# EAGLE board Teensy3_2_4IN:4OUTmcp4628 PANEL (EAGLE 9.5.1)
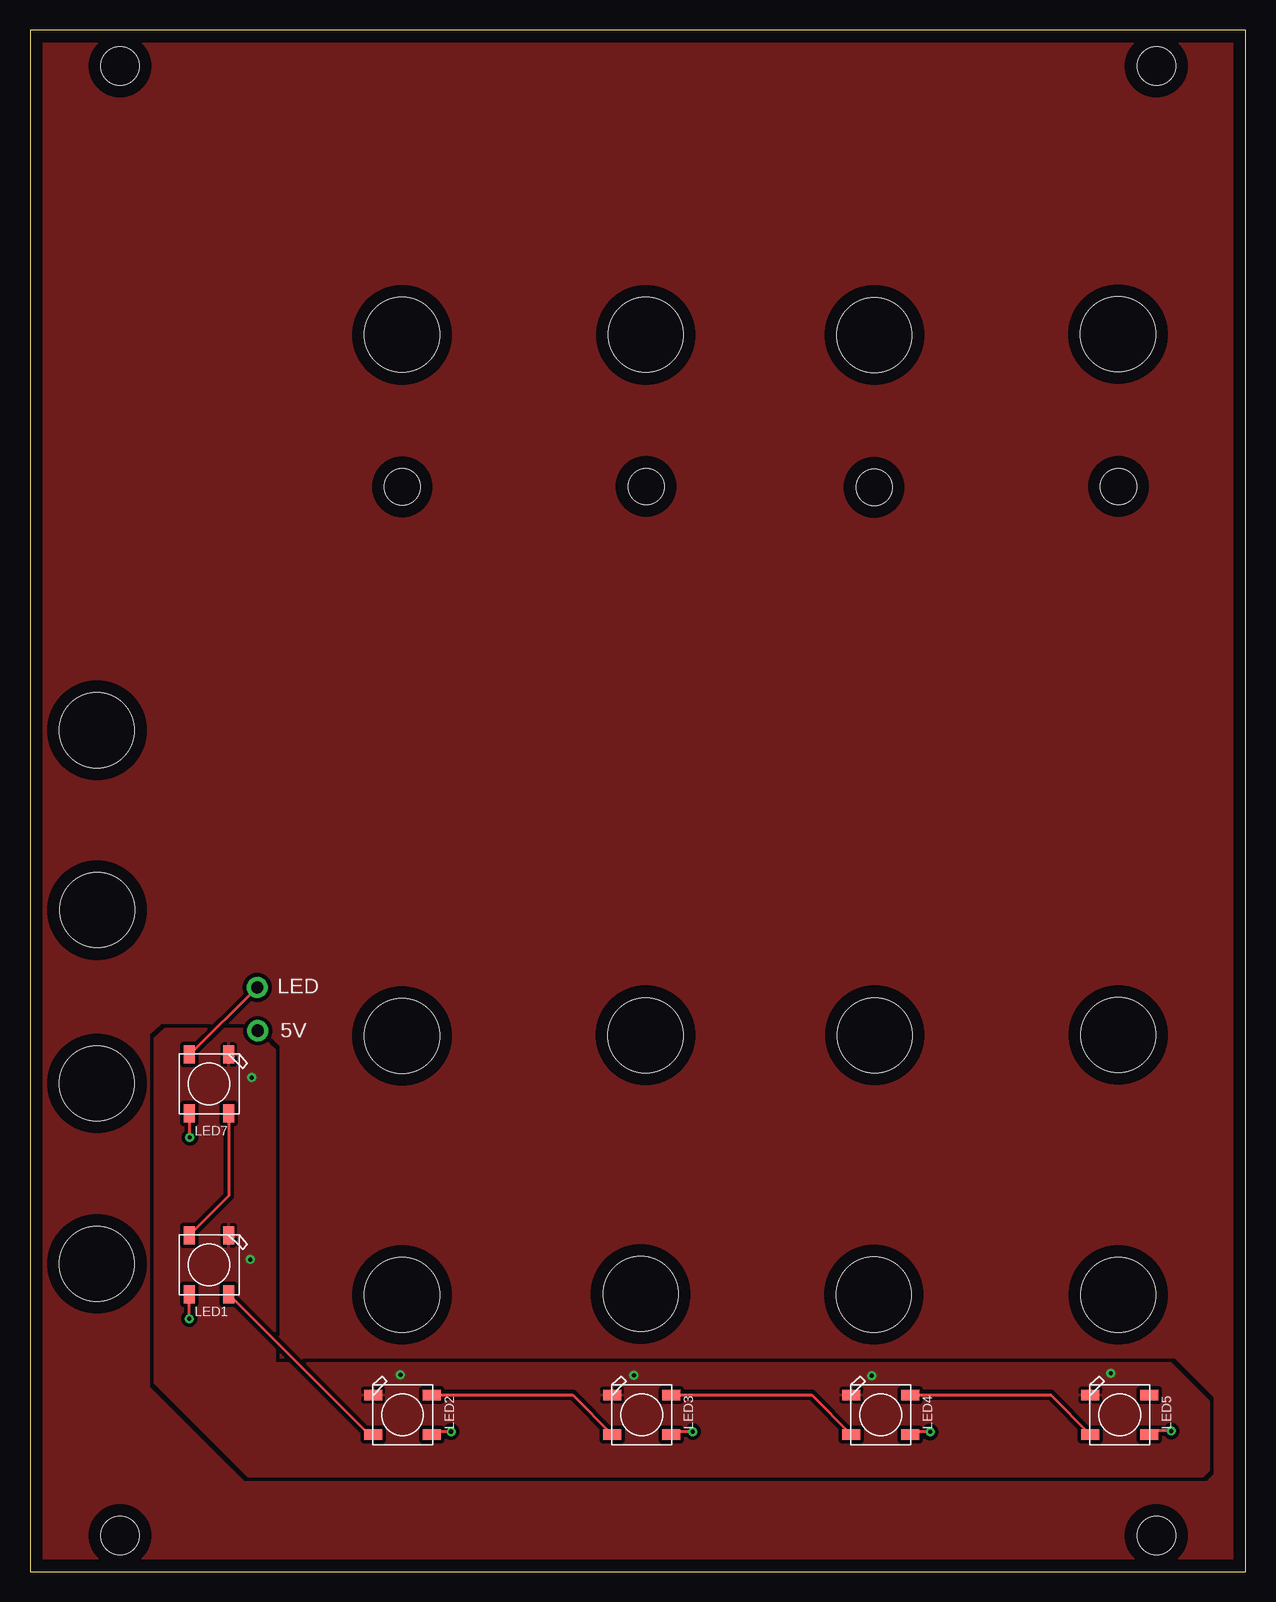
[diagram p0: board, top side]
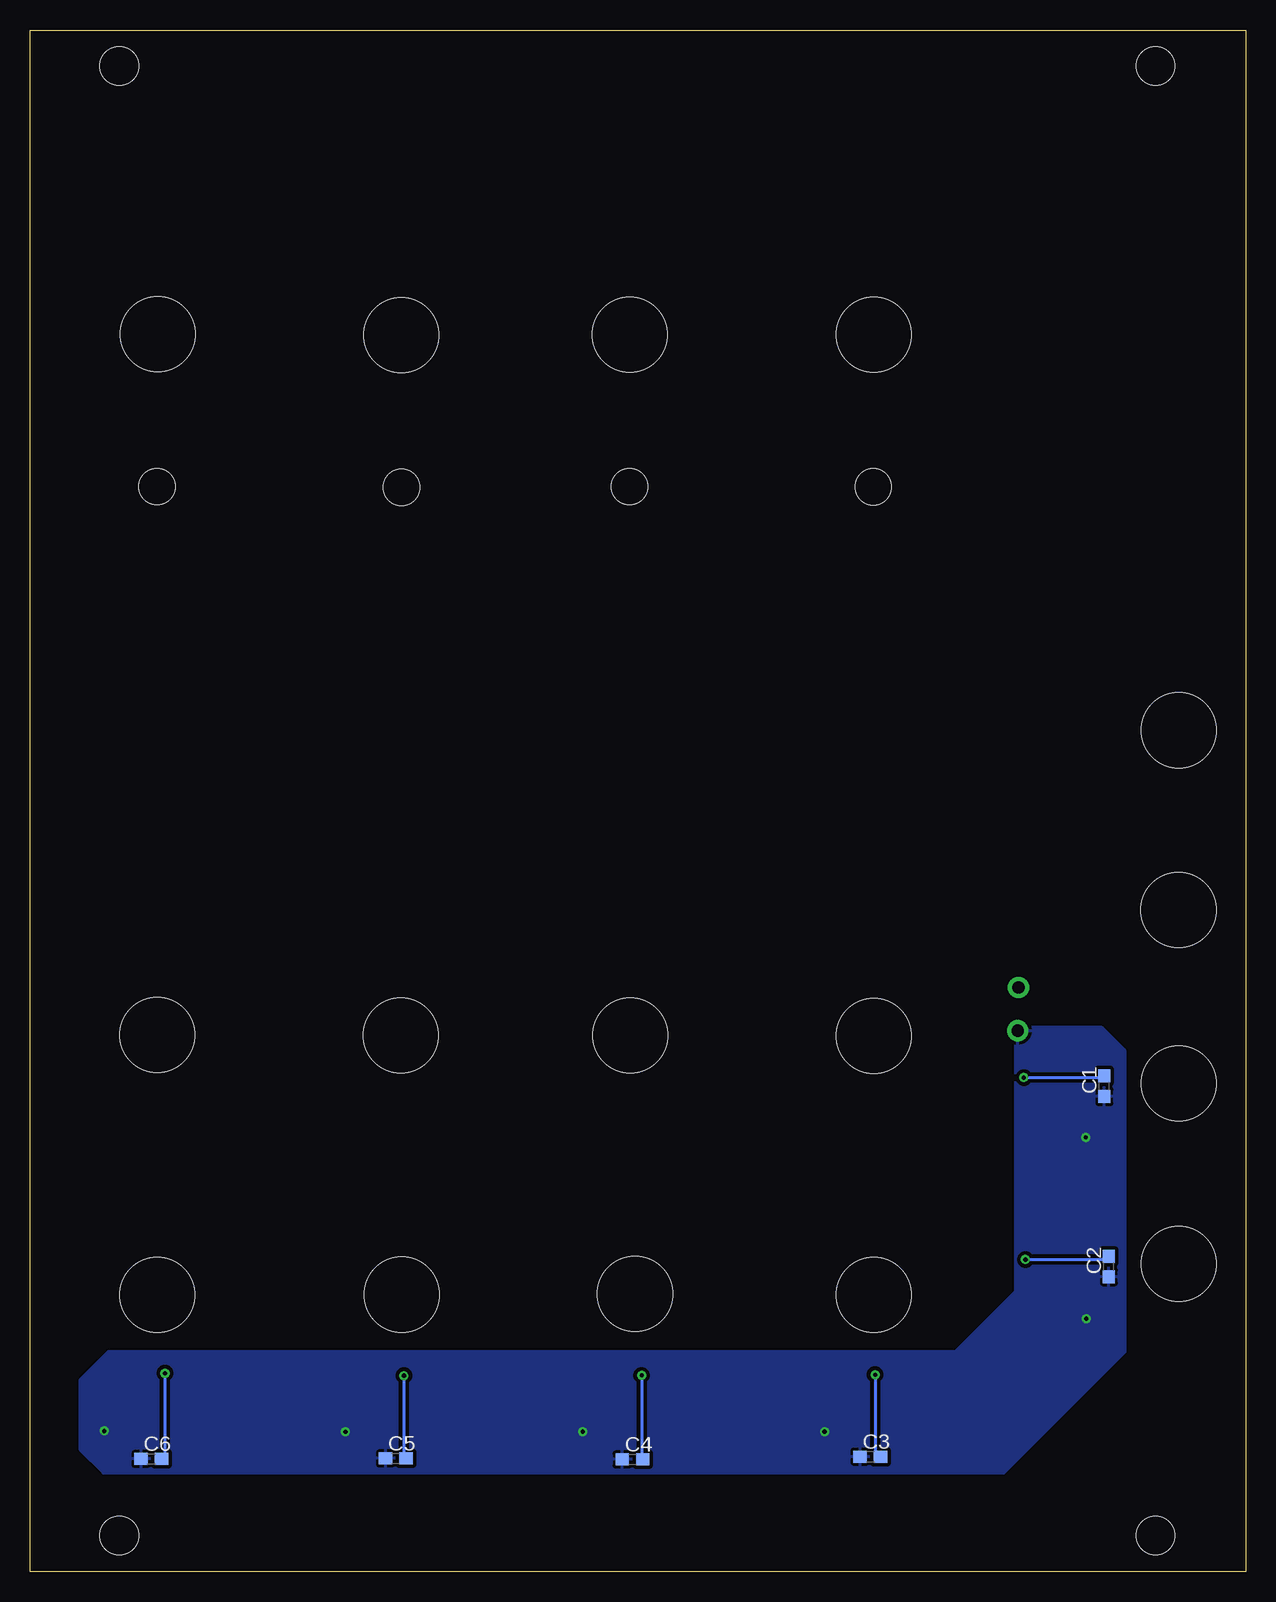
[diagram p1: board, bottom side, seen from below]

Size 101.3 x 128.5 mm. Coordinates in mm from the lower left corner, seen from the top.
Outline: 0,0 101.3,0 101.3,128.5 0,128.5 0,0
Copper layers (1*16): Top 0.035mm / dielectric 1.5mm / Bottom 0.035mm
Design rules "default": minimum track width 6mil, minimum drill 0.35mm, track to track 6mil, track to pad 6mil, pad to pad 6mil, via to via 6mil, smd to smd 6mil, copper to edge 40mil, drill to drill 6mil, minimum pad ring 10mil, minimum via ring 8mil, stop-mask expansion 4mil, vias tented up to drill 0mil, thermal gap 10mil
Net classes: 0 default: width 0.254 mm, clearance 0.305 mm; 1 GND: width 0.406 mm, clearance 0.254 mm to class 0, clearance 0.254 mm; 2 +3V3: width 0.356 mm, clearance 0.152 mm to class 0, clearance 0.254 mm; 3 -10V: width 0.356 mm, clearance 0.152 mm to class 0, clearance 0.254 mm; 4 VCC: width 0.457 mm, clearance 0.152 mm to class 0, clearance 0.254 mm; 5 VEE: width 0.457 mm, clearance 0.152 mm to class 0, clearance 0.254 mm
Holes 6.25 mm at 51.32,103.1 31,103.1 5.57,25.65 5.57,40.69 31,23.06 31,44.65 50.89,23.14 70.32,23.09 90.69,23.06 90.69,44.73 70.39,44.7 51.29,44.7 70.37,103.07 90.66,103.15 5.6,55.14 5.57,70.13
Holes 3.2 mm at 7.5,125.5 7.5,3 93.86,3 93.86,125.5
Holes 3 mm at 70.34,90.37 90.71,90.45 31.02,90.42 51.34,90.45

## Footprints (pad centres in the part's own frame; a part is rotated, then mirrored left to right if it is on the bottom)
NEOPIXELRING_1X01-CLEANBIG = drill 1.016 pad 1.778: 1 0,0
C0603 = smd 1.1 x 1: 1 -0.85,0; 2 0.85,0
WS2812B = smd 1.5 x 0.9: 1-VDD 2.45,-1.65; 2-DOUT 2.45,1.65; 3-GND -2.45,1.65; 4-DIN -2.45,-1.65

## Placement (x,y rotation side)
5V  [NEOPIXELRING_1X01-CLEANBIG]  18.98,45.08 0 top
C1  [C0603]  11.77,40.46 90 bottom
C2  [C0603]  11.39,25.42 90 bottom
C3  [C0603]  31.28,9.57 0 bottom
C4  [C0603]  51.09,9.34 0 bottom
C5  [C0603]  70.82,9.42 0 bottom
C6  [C0603]  91.2,9.39 0 bottom
LED  [NEOPIXELRING_1X01-CLEANBIG]  18.93,48.69 0 top
LED1  WS2812B5050  [WS2812B]  14.92,25.57 270 top
LED2  WS2812B5050  [WS2812B]  31.05,13.06 0 top
LED3  WS2812B5050  [WS2812B]  50.97,13.06 0 top
LED4  WS2812B5050  [WS2812B]  70.89,13.06 0 top
LED5  WS2812B5050  [WS2812B]  90.81,13.06 0 top
LED7  WS2812B5050  [WS2812B]  14.92,40.64 270 top

## Library data of the parts
5V LED = Adafruit NeoPixel Ring 12
C1-C6 = rcl; SPICEPREFIX: C
LED1-LED5 LED7 = WS2812B; AVAILABILITY: Unavailable; DESCRIPTION: Raspberry Pi HAT _40 pin_ Wheeled Robotics Kit; MF: SparkFun Electronics; MP: WS2812B; PACKAGE: None; PRICE: None

## Nets
GND: C1.2 C2.2 C3.2 C4.2 C5.2 C6.2 LED1.3-GND LED2.3-GND LED3.3-GND LED4.3-GND LED5.3-GND LED7.3-GND
N$1: LED1.4-DIN LED7.2-DOUT
N$2: LED1.2-DOUT LED2.4-DIN
N$3: LED2.2-DOUT LED3.4-DIN
N$4: LED3.2-DOUT LED4.4-DIN
N$5: LED4.2-DOUT LED5.4-DIN
N$6: LED7.4-DIN LED.1
VDD: 5V.1 C1.1 C2.1 C3.1 C4.1 C5.1 C6.1 LED1.1-VDD LED2.1-VDD LED3.1-VDD LED4.1-VDD LED5.1-VDD LED7.1-VDD

## Tracks (layer width: path | path; a pad name or v marks a point on that pad's centre or on a via)
GND  (via drill 0.35)
  Bottom 0.254: C6.2 90.05,9.1 v90.05,16.53 | v70.14,16.33 70.14,9.58 C5.2 | C4.2 50.33,9.43 v50.33,16.35 | C3.2 30.87,10.02 v30.87,16.4 | C2.2 11.65,26.01 v18.35,26.01 | C1.2 11.91,41.17 v18.48,41.17
  pour Top: 18.65,45.21 19.87,43.99 20.35,43.51 20.35,17.37 95.06,17.37 98.21,14.22 98.21,8.4 97.72,7.92 18.2,7.92 12.38,13.74 10.42,15.69 10.42,44.47 11.26,45.21
N$1
  Top 0.254: LED7.2-DOUT 16.57,31.32 LED1.4-DIN
N$2
  Top 0.254: LED1.2-DOUT 28.28,11.41 LED2.4-DIN
N$3
  Top 0.254: LED2.2-DOUT 45.22,14.71 LED3.4-DIN
N$4
  Top 0.254: LED3.2-DOUT 65.14,14.71 LED4.4-DIN
N$5
  Top 0.254: LED4.2-DOUT 85.06,14.71 LED5.4-DIN
N$6
  Top 0.254: LED.1 13.33,43.09 LED7.4-DIN
VDD  (via drill 0.35)
  Top 0.254: v95.11,11.71 93.56,11.71 LED5.1-VDD | v75.02,11.64 73.56,11.64 LED4.1-VDD | v55.23,11.66 53.67,11.66 LED3.1-VDD | v35.09,11.66 33.75,11.66 LED2.1-VDD | v13.27,21.08 LED1.1-VDD | v13.32,36.19 13.32,38.14 LED7.1-VDD
  Bottom 0.254: 5V.1 19.01,45.11
  pour Bottom: 12,45.34 19.01,45.34 19.19,45.51 19.19,23.36 24.24,18.31 94.8,18.31 97.14,15.97 97.14,10.16 95.21,8.23 20.13,8.23 10.04,18.31 10.04,43.43 11.92,45.31 11.95,45.31
YAY
  pour Top (rank 3): 0.11,128.29 101.2,128.29 101.46,128.04 101.46,0.4 101.2,0.15 -0.14,0.15 -0.14,128.04

## Text on the board
tStop: Listening in to the winds whipster / I heard a large variety of consonant dissonance. / Krmp, scrff, fwrfff, cxvrmp, ssssswswf, and faaaaaaixsh... / The way that a vowel masked itself / in the speedy constant and consonant / dark pink noise guided my thoughts back to All Hallow's Eve 2004. / My squirming PIC was dressed as a Biochip / while I went as a Precog, / preservative rich bottle of Matcha Latte. / It was too soon for me to realize / the deadly implications of transforming / my skin tone with a thick helping of / Sodium Nitrate and Soylent. | disco naps before big boom baps
tRestrict: i get so weak in the knees | protobaby
tDocu: TEENSY CHI'S PRE-PRE | gate | gate | gate | CV | CV | CV | CV | gate | CV | CV | CV | CV
203bmp: 3 | <
204bmp: IN | IN | IN | IN | IN | IN | OUT | OUT | OUT | OUT | OUT | OUT | the chills that you spill | your groove, I do deeply dig